# Altium PCB Power.PcbDoc
Units mil, origin at the board's own origin, x right, y up, seen from the top; angles counter-clockwise.
Board outline 3625 x 3400 mil, 2 copper layers (Component Side, Bottom Layer), stack 65.756 mil thick; 69 components, 42 nets, 303 pads, 74 vias.
Unrouted connection lines stored in the file: 1.
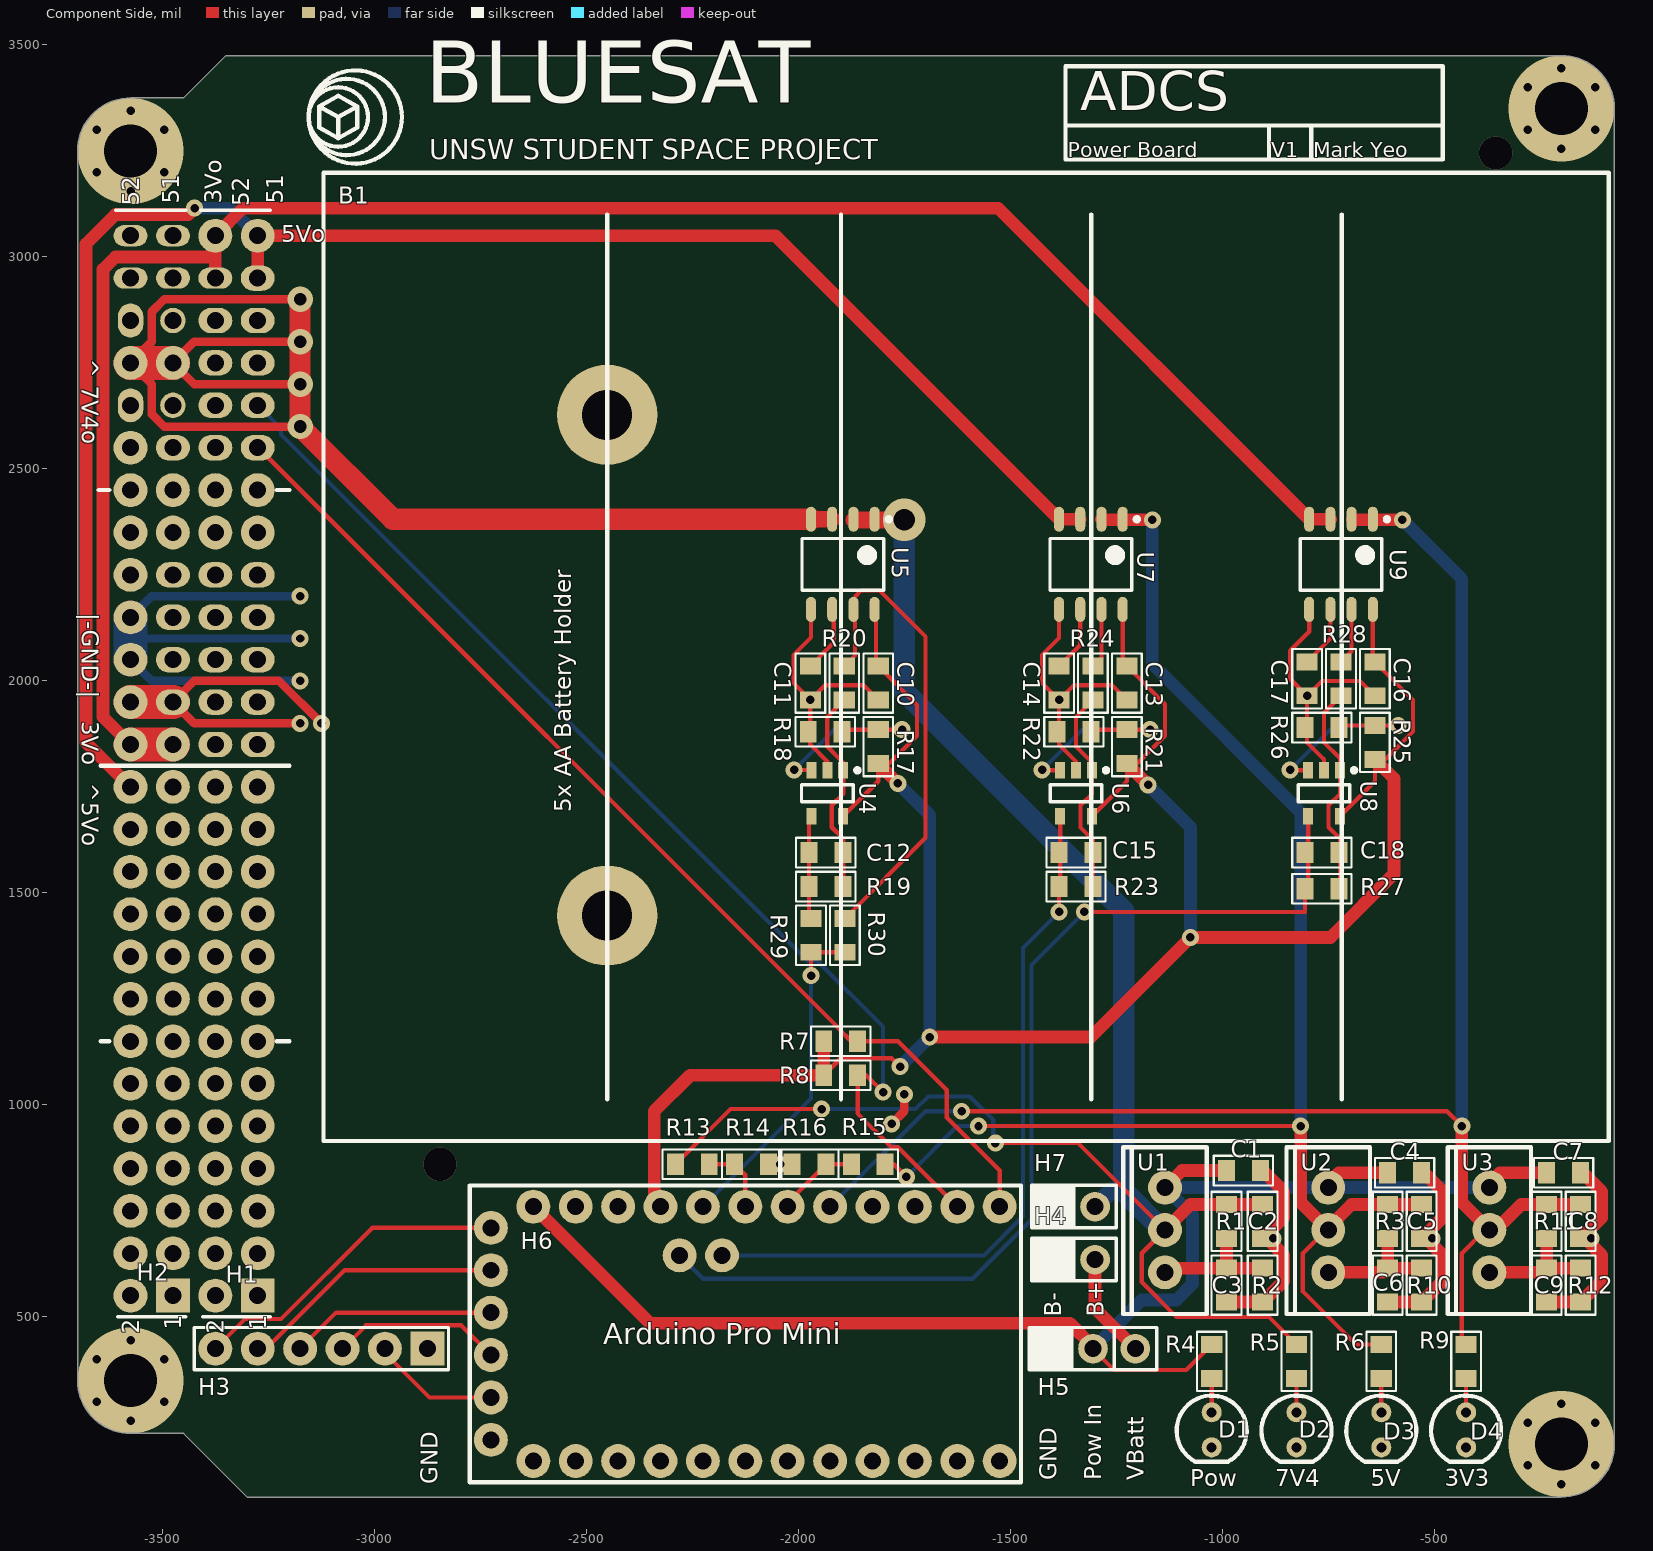
[diagram p0: Component Side view]
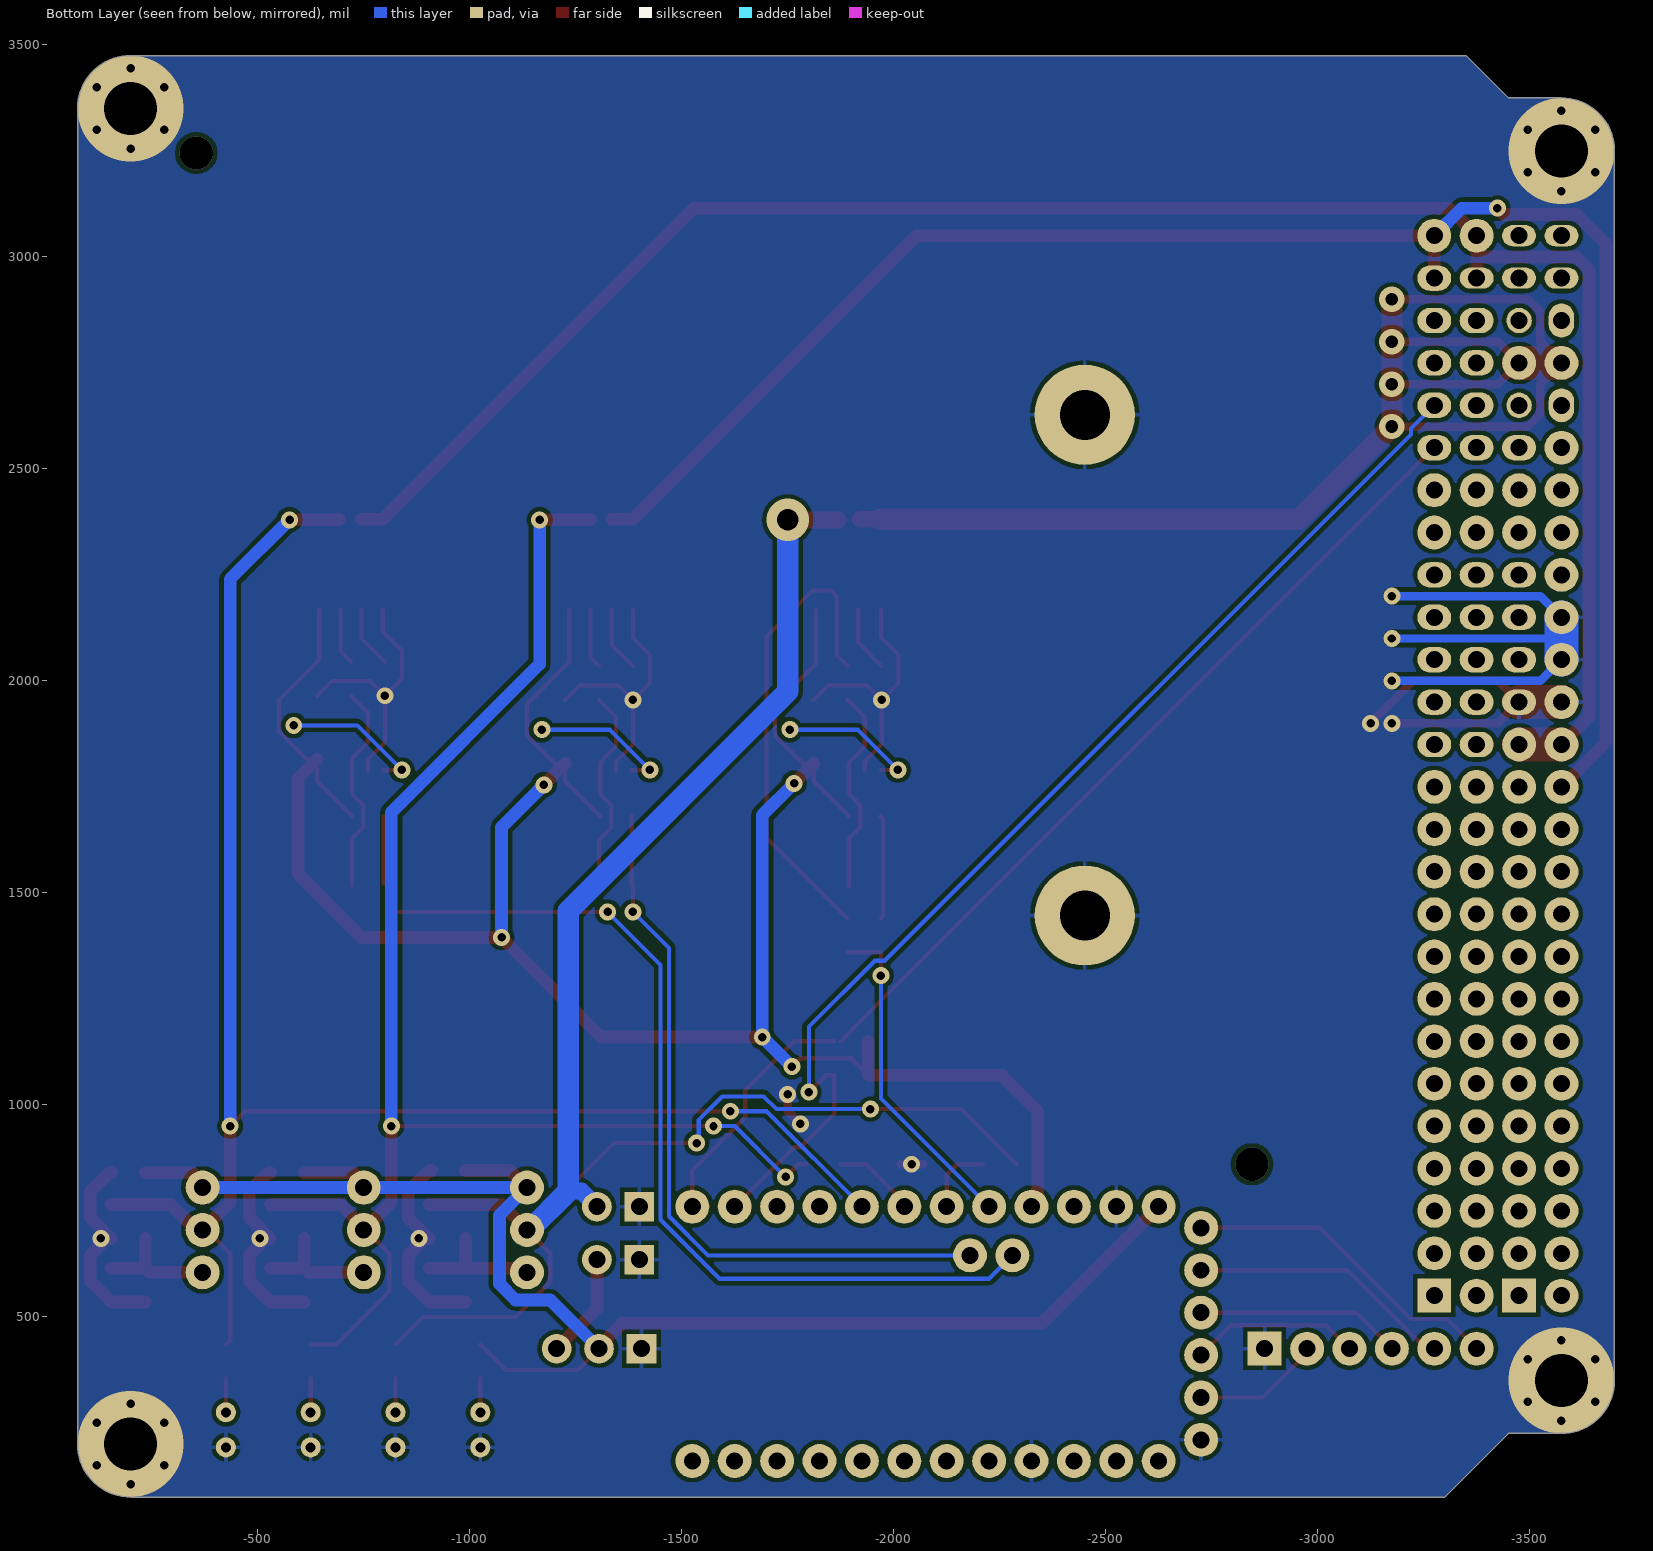
[diagram p1: Bottom Layer view, seen from below]

## Layer stack, top to bottom
Top Solder: solder mask 0.394, Solder Resist, Dk 3.5
Component Side: signal copper 1.378
Dielectric 1: core 63, FR-4, Dk 4.2
Bottom Layer: signal copper 1.378
Solder Side: solder mask 0.394, Solder Resist, Dk 3.5

## Board outline
-3575,225 cw(c-3575,350) -3700,350 -3700,3250 cw(c-3575,3250) -3575,3375 -3450,3375 -3350,3475 -200,3475 cw(c-200,3350) -75,3350 -75,200 cw(c-200,200) -200,75 -3300,75 -3450,225

## Design rules (kind name [scope] priority, off if disabled: settings)
Clearance [All] p1: gap=10
Clearance "Clearance (Same Net)" [All] p2: gap=0 except(8: SMDPad-SMDPad SMDPad-THPad SMDPad-Via)
ComponentClearance [All] p1: gap=0 collisioncheckmode=3 verticalgap=0 showdistances=FALSE
HoleSize HoleSize_1 [All] p1: absolutevalues=TRUE maxlimit=100000 minlimit=24 maxpercent=80.000 minpercent=20.000
HoleSize [All] p2: absolutevalues=TRUE maxlimit=100 minlimit=1 maxpercent=80.000 minpercent=20.000
HoleToHoleClearance mdViaViaSameLayer [All] p1: gap=8 allowstackedmicrovias=TRUE
HoleToHoleClearance [All] p2: gap=10 allowstackedmicrovias=TRUE
PasteMaskExpansion mlMinCreamFrame [All] p1: expansion=0
PasteMaskExpansion [All] p2: expansion=0
PlaneConnect PlaneConnect_1 [All] p1: planeconnectstyle=Relief reliefexpansion=20 reliefentries=4 reliefconductorwidth=10 reliefairgap=10
PlaneConnect PlaneConnect_2 [IsVia AND InNet('GND')] p2: planeconnectstyle=Direct reliefexpansion=20 reliefentries=4 reliefconductorwidth=10 reliefairgap=10
PolygonConnect ThermalVias [IsVia] p1: connectstyle=Direct reliefconductorwidth=10 reliefentries=4 polygonreliefangle="90 Angle" airgapwidth=10
PolygonConnect [All] p2: connectstyle=Relief reliefconductorwidth=10 reliefentries=4 polygonreliefangle="90 Angle" airgapwidth=10
RoutingVias [All] p1: holewidth=28 width=50 viastyle="Through Hole" minholewidth=28 minwidth=50 maxholewidth=28 maxwidth=50
SilkToSilkClearance [All] p1 off: silktosilkclearance=10
SilkToSolderMaskClearance [IsPad] p1 off: minsilkscreentomaskgap=10 clearancetoexposedcopper=TRUE
SolderMaskExpansion mlMinStopFrame [All] p1: expansion=4
SolderMaskExpansion [All] p2: expansion=4
Width Width_1 [All] p1: maxlimit=100000 minlimit=6 preferedwidth=10
Width [All] p2: maxlimit=10 minlimit=8 preferedwidth=10
23 further rules are at their usual default settings.

## Components (designator, comment, footprint, x,y, rotation, side; value= is the part's Value field where it differs from the comment)
B1 "5x AA Battery Holder" "5x AA Battery Holder" -3120,915 r0 top
C1 "100nF" 0805C-TBD -980,845 r0 top
C2 "1UF" 0805C-GENERIC -905,755 r270 top
C3 "10uF" 0805C-GENERIC -990,605 r270 top
C4 "100nF" 0805C-TBD -600,840 r0 top
C5 "1UF" 0805C-GENERIC -530,755 r270 top
C6 "10uF" 0805C-GENERIC -610,605 r270 top
C7 "100nF" 0805C-TBD -225,840 r0 top
C8 "1UF" 0805C-GENERIC -155,755 r270 top
C9 "10uF" 0805C-GENERIC -235,605 r270 top
C10 "100nF" 0805C-TBD -1811.57,2025 r270 top
C11 "10nF" 0805C-TBD -1971.57,2025 r270 top
C12 "1nF" 0805C-TBD -1965,1595 r0 top
C13 "100nF" 0805C-TBD -1225,2025 r270 top
C14 "10nF" 0805C-TBD -1385,2025 r270 top
C15 "1nF" 0805C-TBD -1375,1595 r0 top
C16 "100nF" 0805C-TBD -640,2035 r270 top
C17 "10nF" 0805C-TBD -800,2035 r270 top
C18 "1nF" 0805C-TBD -795,1595 r0 top
D1 "LED" LED -1025,275 r0 top
D2 "LED" LED -825,275 r0 top
D3 "LED" LED -625,275 r0 top
D4 "LED" LED -425,275 r0 top
H1 "26X2 Header" "26X2 Header"#1 -3275,550 r90 top
H2 "26X2 Header" "26X2 Header"#2 -3475,550 r90 top
H3 "Header 6" HDR1X6 -2875,425 r180 top
H4 "HEADER-1X2" HEADER-1X2 -1400,635 r90 top
H5 "HEADER-1X3" HEADER-1X3 -1405,425 r90 top
H6 "Arduino Pro Mini" "Arduino Pro Mini" -2625,160 r90 top
H7 "HEADER-1X2" HEADER-1X2 -1400,760 r90 top
R1 "1R" 0805R-GENERIC -990,695 r90 top
R2 "1R" 0805R-GENERIC -905,605 r270 top
R3 "1R" 0805R-GENERIC -610,695 r90 top
R4 "150R" 0805R-150 -1025,425 r270 top
R5 "150R" 0805R-150 -825,425 r270 top
R6 "150R" 0805R-150 -625,425 r270 top
R7 "4K7" 0805R-4K7 -1930,1150 r0 top
R8 "4K7" 0805R-4K7 -1930,1070 r0 top
R9 "150R" 0805R-150 -425,425 r270 top
R10 "1R" 0805R-GENERIC -530,605 r270 top
R11 "1R" 0805R-GENERIC -235,695 r90 top
R12 "1R" 0805R-GENERIC -155,605 r270 top
R13 "28K5" 0805R-10K -2290,860 r0 top
R14 "10K" 0805R-10K -2150,860 r0 top
R15 "10K" 0805R-10K -1795,860 r180 top
R16 "40K" 0805R-10K -1935,860 r180 top
R17 "100K" 0805R-100K -1811.57,1815 r90 top
R18 "100K" 0805R-100K -1906.57,1880 r180 top
R19 "3K3" 0805R-3K3 -1965,1515 r0 top
R20 "1K" 0805R-1K -1891.57,2025 r270 top
R21 "100K" 0805R-100K -1225,1815 r90 top
R22 "100K" 0805R-100K -1320,1880 r180 top
R23 "3K3" 0805R-3K3 -1375,1515 r0 top
R24 "1K" 0805R-1K -1305,2025 r270 top
R25 "100K" 0805R-100K -640,1825 r90 top
R26 "100K" 0805R-100K -735,1890 r180 top
R27 "3K3" 0805R-3K3 -795,1510 r0 top
R28 "1K" 0805R-1K -720,2035 r270 top
R29 "0R" 0805R-GENERIC -1970,1430 r270 top
R30 "0R" 0805R-GENERIC -1890,1430 r270 top
U1 "LM317T" LM317T -1135,605 r90 top
U2 "LM317T" LM317T -750,605 r90 top
U3 "LM317T" LM317T -370,605 r90 top
U4 "LM321" LM321 -1931.57,1735 r270 top
U5 "ACS712" ACS712 -1895,2275 r270 top
U6 "LM321" LM321 -1345,1735 r270 top
U7 "ACS712" ACS712 -1310,2275 r270 top
U8 "LM321" LM321 -760,1735 r270 top
U9 "ACS712" ACS712 -720,2275 r270 top

## Footprints (in the part's own frame and the unit in brackets; to place one, negate y for a bottom-side part, rotate by r counter-clockwise, add the part's x,y. Pads: shape width x height; smd on the part's side, far side on the other; paste and mask are expansions set on the pad)
"5x AA Battery Holder" [mm]
  round 6 hole 3 mask+0.102: 1(17,43.5)
  round 6 hole 3: 2(17,13.5)
  silkscreen extent 0,0 77,58
"26X2 Header"#1 [mil]
  rect 80x80 hole 40: 1(0,0)
  round 80 hole 40: 2(0,100) 3(100,0) 4(100,100) 5(200,0) 6(200,100) 7(300,0) 8(300,100) 9(400,0) 10(400,100) 11(500,0) 12(500,100) 13(600,0) 14(600,100) 15(700,0) 16(700,100) 17(800,0) 18(800,100) 19(900,0) 20(900,100) 21(1000,0) 22(1000,100) 23(1100,0) 24(1100,100) 25(1200,0) 26(1200,100) 37(1800,0) 38(1800,100) 39(1900,0) 40(1900,100) 51(2500,0) 52(2500,100)
  oval 60x80 hole 40: 27(1300,0) 28(1300,100) 29(1400,0) 30(1400,100) 31(1500,0) 32(1500,100) 33(1600,0) 34(1600,100) 35(1700,0) 36(1700,100) 41(2000,0) 42(2000,100) 43(2100,0) 44(2100,100) 45(2200,0) 46(2200,100) 47(2300,0) 48(2300,100) 49(2400,0)
  oval 50x80 hole 40: 50(2400,100)
  silkscreen extent -50,-30 2560,135, body extent -55,-47 2555,150, height 335
"26X2 Header"#2 [mil]
  rect 80x80 hole 40: 1(0,0)
  round 80 hole 40: 2(0,100) 3(100,0) 4(100,100) 5(200,0) 6(200,100) 7(300,0) 8(300,100) 9(400,0) 10(400,100) 11(500,0) 12(500,100) 13(600,0) 14(600,100) 15(700,0) 16(700,100) 17(800,0) 18(800,100) 19(900,0) 20(900,100) 21(1000,0) 22(1000,100) 23(1100,0) 24(1100,100) 25(1200,0) 26(1200,100) 27(1300,0) 28(1300,100) 30(1400,100) 32(1500,100) 34(1600,100) 36(1700,100) 37(1800,0) 38(1800,100) 39(1900,0) 40(1900,100) 42(2000,100) 45(2200,0) 46(2200,100)
  oval 60x80 hole 40: 29(1400,0) 31(1500,0) 33(1600,0) 35(1700,0) 41(2000,0)
  round 60 hole 40: 43(2100,0) 47(2300,0)
  oval 80x60 hole 40: 44(2100,100) 48(2300,100)
  oval 50x80 hole 40: 49(2400,0) 50(2400,100) 51(2500,0) 52(2500,100)
  silkscreen extent -50,-30 2560,135, body extent -55,-47 2555,150, height 335
0805C-GENERIC [mil] "CAPACITOR 0805"
  rect 40x50 smd: 1(-10,0) 2(70,0)
  silkscreen extent -40,-35 100,35, body extent -11,-25 70,25, height 26
0805C-TBD [mil] "CAPACITOR 0805"
  rect 40x50 smd: 1(-10,0) 2(70,0)
  silkscreen extent -40,-35 100,35, body extent -11,-25 70,25, height 26
0805R-1K [mil] "RESISTOR 0805"
  rect 40x50 smd: 1(-10,0) 2(70,0)
  silkscreen extent -40,-35 100,35, body extent -11,-25 70,25, height 27
0805R-3K3 [mil] "RESISTOR 0805"
  rect 40x50 smd: 1(-10,0) 2(70,0)
  silkscreen extent -40,-35 100,35, body extent -11,-25 70,25, height 27
0805R-4K7 [mil] "RESISTOR 0805"
  rect 40x50 smd: 1(-10,0) 2(70,0)
  silkscreen extent -40,-35 100,35, body extent -11,-25 70,25, height 27
0805R-10K [mil] "RESISTOR 0805"
  rect 40x50 smd: 1(0,0) 2(80,0)
  silkscreen extent -30,-35 110,35, body extent -1,-25 80,25, height 27
0805R-100K [mil] "RESISTOR 0805"
  rect 40x50 smd: 1(-10,0) 2(70,0)
  silkscreen extent -40,-35 100,35, body extent -11,-25 70,25, height 27
0805R-150 [mil] "RESISTOR 0805"
  rect 40x50 smd: 1(-10,0) 2(70,0)
  silkscreen extent -40,-35 100,35, body extent -11,-25 70,25, height 27
0805R-GENERIC [mil] "RESISTOR 0805"
  rect 40x50 smd: 1(-10,0) 2(70,0)
  silkscreen extent -40,-35 100,35, body extent -11,-25 70,25, height 27
ACS712 [mm]
  oval 1.5x0.6 smd: 1(-2.7,1.905) 2(-2.7,0.635) 3(-2.7,-0.635) 4(-2.7,-1.905) 5(2.7,-1.905) 6(2.7,-0.635) 7(2.7,0.635) 8(2.7,1.905)
  silkscreen extent -2.82,-2.45 1.55,2.88, body extent -3,-2.45 3,2.45, height 1.9
"Arduino Pro Mini" [mil]
  round 80 hole 40: 1(0,0) 2(0,-100) 3(0,-200) 4(0,-300) 5(0,-400) 6(0,-500) 7(0,-600) 8(0,-700) 9(0,-800) 10(0,-900) 11(0,-1000) 12(0,-1100) 13(600,0) 14(600,-100) 15(600,-200) 16(600,-300) 17(600,-400) 18(600,-500) 19(600,-600) 20(600,-700) 21(600,-800) 22(600,-900) 23(600,-1000) 24(600,-1100) 25(485,-345) 26(485,-445) 27(50,100) 28(150,100) 29(250,100) 30(350,100) 31(450,100) 32(550,100)
  silkscreen extent -50,-1150 650,150
HDR1X6 [mil] "Connector; Header; 6 Position"
  rect 80x80 hole 40: 1(0,0)
  round 80 hole 40: 2(100,0) 3(200,0) 4(300,0) 5(400,0) 6(500,0)
  silkscreen extent -50,-50 550,50
HEADER-1X2 [mil]
  rect 70x70 hole 40: 1(0,0)
  round 70 hole 40: 2(0,-100)
  silkscreen extent -50,-150 50,50, body extent -50,-150 50,50, height 470
HEADER-1X3 [mil]
  rect 70x70 hole 40: 1(0,0)
  round 70 hole 40: 2(0,-100) 3(0,-200)
  silkscreen extent -50,-250 50,50, body extent -50,-250 50,50, height 470
LED [mm]
  round 1.2 hole 0.6: 1(0,0) 2(0,-2.1)
  silkscreen extent -2.1,-2.96 2.1,1
LM317T [mil]
  round 80 hole 40: 1(0,0) 2(100,0) 3(200,0)
  silkscreen extent -98,-98 295,98
LM321 [mm]
  rect 1x0.6 smd: 1(-1.375,0.95) 2(-1.375,0) 3(-1.375,-0.95) 4(1.375,-0.95) 5(1.375,0.95)
  silkscreen extent -1.5,-1.55 0.5,1.93, body extent -1.5,-1.53 1.5,1.53, height 1.45

## Part data
C1 C4 C7 C10 C11 C12 C13 C14 C15 C16 C17 C18: library part 0805C-100nF-25V-X7R-MUR, "CAPACITOR 0805 CERAMIC"
C2 C5 C8: library part 0805C-2U2-6V3-X5R-PAN, "CAPACITOR 0805 CERAMIC"
C3 C6 C9: library part 0805C-10UF-25V-X5R-SAM, "CAPACITOR 0805 CERAMIC"
D1 D2 D3 D4: "Small LED"
H3: "Header, 6-Pin"
R1 R2 R3 R10 R11 R12: library part 0805R-1R, "RESISTOR 0805 1/3 WATT"
R4 R5 R6 R9: library part 0805R-150, "RESISTOR 0805 1/4 WATT THIN FILM"
R7 R8: library part 0805R-4K7, "RESISTOR 0805 1/4 WATT THIN FILM"
R13 R14 R15 R16: library part 0805R-10K, "RESISTOR 0805 1/4 WATT THIN FILM"
R17 R18 R21 R22 R25 R26: library part 0805R-100K, "RESISTOR 0805 1/4 WATT THIN FILM"
R19 R23 R27: library part 0805R-3K3, "RESISTOR 0805 1/4 WATT THIN FILM"
R20 R24 R28: library part 0805R-1K, "RESISTOR 0805 1/4 WATT THIN FILM"
R29 R30: library part 0805R-0R, "RESISTOR 0805 1 WATT"
U1 U2 U3: "Adjustable Voltage Regulator"
U4 U6 U8: "Op-amp"
U5 U7 U9: "Current Sensor"

## Via types
v1: diameter 40, hole 20, Component Side to Bottom Layer, 63 vias
v2: diameter 60, hole 30, Component Side to Bottom Layer, 4 vias
v3: diameter 250, hole 125, Component Side to Bottom Layer, 4 vias
v4: diameter 78.74, hole 78.74, Component Side to Bottom Layer, 2 vias
v5: diameter 100, hole 50, Component Side to Bottom Layer, 1 vias

## Nets (pads, with @x,y where several pads share a name; then routed paths per layer and width w, separated by ;. In a path a pad name is that pad's centre, name@x,y a point inside that pad or via, vN(x,y) a via of type N, cw(c..) or ccw(c..) an arc to the next point about the centre after c; other vN are vias at no path point)
3V3: C8.1 H6.20 R9.1 R11.2 U3.2 U9.1 U9.2 | length 4023.1
  Component Side w10: v1(-1615,985) -470,985 v1(-435,950) ; R9.1 -435,445 -435,650 U3.2@-380,705
  Component Side w30: U9.2@-693.7,2380 v1(-575,2380) ; v1(-435,950) -435,770 U3.2 ; U3.2@-380,705 U3.2 ; C8.1 R11.2 -295,765 -355,705 U3.2
  Bottom Layer w10: H6.20 -1700,985 v1(-1615,985)
  Bottom Layer w30: v1(-575,2380) -435,2240 v1(-435,950)
3V3_OUT: H1.50 H1.52 H2.27 H2.28 U9.3 U9.4 | length 4585.6
  Component Side w30: H2.28 -3640,1915 -3640,2970.71 -3610.71,3000 -3375,3000 ; H1.50 -3375,3000 ; U9.3 U9.4 -1528.7,3115 -3310,3115 H1.52 -3375,3000
  Component Side w80: H2.28 H2.27
5V: C5.1 R3.2 R6.1 R15.1 U2.2 U7.1 U7.2 | length 3664
  Component Side w10: R15.1 -1775,860 v1(-1745,830) ; v1(-1575,950) v1(-815,950) ; U2.2@-755,705 -810,650 -810,560 -685,435 R6.1
  Component Side w30: U7.2 -1283.7,2380 v1(-1165,2380) ; v1(-815,950) -815,770 U2.2@-752.5,707.5 ; U2.2@-755,705 U2.2@-752.5,707.5 ; U2.2 U2.2@-752.5,707.5 ; C5.1 R3.2 -695,765 U2.2@-752.5,707.5
  Bottom Layer w10: v1(-1745,830) -1625,950 v1(-1575,950)
  Bottom Layer w30: v1(-1165,2380) -1165,2040 -815,1690 v1(-815,950)
5V_OUT: H1.49 H1.51 H2.25 H2.26 U7.3 U7.4 | length 4108
  Component Side w30: H2.26 -3680,1855 -3680,3030.71 -3610.71,3100 -3439,3100 v1(-3424,3115) ; H1.49 H1.51 -2053.7,3050 U7.4 U7.3
  Bottom Layer w30: v1(-3424,3115) -3340,3115 H1.51
7.5V_IN: C1.1 C4.1 C7.1 H5.2 H6.13 R4.1 U1.3 U2.3 U3.3 | length 3578.2
  Component Side w10: H5.2 -1255,375 -1085,375 R4.1
  Component Side w30: H6.13 -2350,485 -1359.64,485 -1305,430.36 H5.2 ; U1.3 -1095,845 C1.1 ; U2.3@-755,805 -755,810 -725,840 C4.1 ; U3.3@-380,805 -345,840 C7.1
  Bottom Layer w30: H5.2 -1190,540 -1108.08,540 -1070,578.08 -1070,740 U1.3 U3.3@-380,805
7V4: C2.1 H7.2 R1.2 R5.1 R13.1 U1.2 U5.1 U5.2 | length 4341.7
  Component Side w10: R13.1 -2160,990 v1(-1945,990) ; v1(-1535,910) -1340,910 U1.2 -1190,650 -1190,582.22 -1107.78,500 -890,500 R5.1
  Component Side w30: U1.2 -1075,765 R1.2 C2.1
  Component Side w40: U5.2@-1868.7,2380 v5(-1750,2380)
  Bottom Layer w10: v1(-1945,990) -1723.28,990 -1693.28,1020 -1595.5,1020 -1540,964.5 -1540,915 v1(-1535,910)
  Bottom Layer w40: H7.2 -1263.57,796.43 -1232.5,796.43
  Bottom Layer w50: v5(-1750,2380) -1750,1975 -1232.5,1457.5 -1232.5,796.43 -1141.07,705 U1.2
7V4_OUT: H2.45 H2.46 U5.3 U5.4 | length 3394.1
  Component Side w20: v2(-3175,2600) -3495.71,2600 -3525,2629.29 -3525,2700 H2.46 -3525,2800 -3525,2870.71 -3495.71,2900 v2(-3175,2900) ; v2(-3175,2700) -3425,2700 H2.45 -3425,2800 v2(-3175,2800)
  Component Side w40: U5.4 U5.3
  Component Side w50: v2(-3175,2900) v2(-3175,2600) -2956.3,2381.3 U5.4
  Component Side w80: H2.46 H2.45
CURR_3V3: C18.1 H6.25 R27.1 U8.4 | length 2426.4
  Component Side w10: v1(-1325,1455) -805,1455 R27.1@-805,1515 ; R27.1@-797.4,1522.6 U8.4
  Bottom Layer w10: H6.25 -2225,590 -1588.93,590 -1450,728.93 -1450,1330 v1(-1325,1455)
CURR_5V: C15.1 H6.26 R23.1 U6.4 | length 1730.7
  Component Side w10: v1(-1385,1455) R23.1 ; R23.1@-1382.4,1517.6 U6.4
  Bottom Layer w10: H6.26@-2180,660 -2165,645 -1562.22,645 -1470,737.22 -1470,1370 v1(-1385,1455)
CURR_7V4: H6.17 R29.2 R30.2 | length 785.6
  Component Side w10: v1(-1970,1305) R29.2 R30.2
  Bottom Layer w10: H6.17 -1970,1015 v1(-1970,1305)
GND: B1.1 B1.2 C1.2 C2.2 C3.2 C4.2 C5.2 C6.2 C7.2 C8.2 C9.2 C10.2 C11.2 C13.2 C14.2 C16.2 C17.2 D1.2 D2.2 D3.2 D4.2 H2.29 H2.30 H2.32 H2.34 H3.1 H4.1 H5.1 H6.4 H6.14 H6.27 H7.1 R2.2 R10.2 R12.2 R14.2 R16.2 R18.2 R22.2 R26.2 U4.2 U5.5 U6.2 U7.5 U8.2 U9.5 | length 5611.2
  Component Side w10: U5.5 -1970,2102.79 -2011.57,2061.21 -2011.57,1995 v1(-1971.57,1955) ; U4.2 -1931.57,1810 -1971.57,1850 v1(-1971.57,1955) ; C10.2 -1846.57,1990 -1936.57,1990 v1(-1971.57,1955) ; U7.5 -1385,2101.21 -1425,2061.21 -1425,1995 v1(-1385,1955) ; U6.2 -1345,1810 -1385,1850 v1(-1385,1955) ; C13.2 -1260,1990 -1350,1990 v1(-1385,1955) ; U9.5 -795,2116.21 -840,2071.21 -840,2005 v1(-800,1965) ; U8.2 -760,1815 -800,1855 v1(-800,1965) ; C16.2 -675,2000 -765,2000 v1(-800,1965)
  Component Side w20: v1(-3175,1900) -3425,1900 H2.29 -3425,2000 -3225,2000 v1(-3125,1900) ; R14.2 R16.2 ; v1(-1780,955) -1750,985 v1(-1750,1025)
  Component Side w30: C3.2 R2.2 ; C1.2 -904.64,845 -855,795.36 -855,734.64 -904.64,685 -894.64,685 -855,645.36 -855,584.64 R2.2@-904.64,535 ; C6.2 R10.2 -529.64,535 -480,584.64 -480,645.36 -519.64,685 -529.64,685 -480,734.64 -480,795.36 -524.64,840 C4.2 ; C9.2 R12.2 -154.64,535 -105,584.64 -105,645.36 -144.64,685 -154.64,685 -105,734.64 -105,795.36 -149.64,840 C7.2
  Component Side w80: H2.30 H2.29
  Bottom Layer w20: H2.32 -3525,2000 v1(-3175,2000) ; -3575,2100 v1(-3175,2100) ; H2.34 -3525,2200 v1(-3175,2200)
  Bottom Layer w80: H2.32 -3575,2100 H2.34
  other v1: -200,105 -280,150 -120,150 -280,250 -120,250 -3575,255 -200,295 -3655,300 -3495,300 -3655,400 -3495,400 -3575,445 -880,685 -505,685 -130,685 -2042.5,860 -3575,3155 -3655,3200 -3495,3200 -200,3255 -3655,3300 -3495,3300 -280,3300 -120,3300 -3575,3345 -280,3400 -120,3400 -200,3445
  other v3: -200,200 -3575,350 -3575,3250 -200,3350
NetC3_1: C3.1 R1.1 R2.1 U1.1 | length 304.1
  Component Side w30: U1.1 -1125,615 C3.1 ; R1.1 C3.1 ; R2.1 C3.1
NetC6_1: C6.1 R3.1 R10.1 U2.1 | length 299.1
  Component Side w30: U2.1@-755,605 -620,605 C6.1 ; R3.1 C6.1 ; R10.1 C6.1
NetC9_1: C9.1 R11.1 R12.1 U3.1 | length 299.1
  Component Side w30: U3.1@-380,605 -245,605 C9.1 ; R11.1 C9.1 ; R12.1 C9.1
NetC11_1: C11.1 U5.6 | length 156.5
  Component Side w10: C11.1 -1916.57,2090 U5.6@-1916.57,2168.7
NetC12_1: C12.1 R19.1 R29.1 U4.4 | length 245.4
  Component Side w10: R29.1 -1975,1445 R19.1 C12.1 -1975,1674.84 U4.4
NetC12_2: C12.2 R19.2 R20.2 U4.1 | length 493.4
  Component Side w10: R19.2@-1894.17,1515.83 -1894.17,1628.16 -1920.98,1654.97 -1920.98,1706.76 -1894.17,1733.58 U4.1 -1894.17,1807.6 -1931.57,1845 -1931.57,1915 R20.2
NetC14_1: C14.1 U7.6 | length 154.4
  Component Side w10: C14.1 -1335,2085 U7.6
NetC15_2: C15.2 R23.2 R24.2 U6.1 | length 495.3
  Component Side w10: R23.2 C15.2 -1305,1625 -1334.41,1654.41 -1334.41,1706.76 -1307.6,1733.58 U6.1 -1307.6,1807.6 -1345,1845 -1345,1915 R24.2
NetC17_1: C17.1 U9.6 | length 146.5
  Component Side w10: C17.1 -745,2100 U9.6
NetC18_2: C18.2 R27.2 R28.2 U8.1 | length 501.9
  Component Side w10: R27.2@-722.6,1517.4 -722.6,1628.16 -749.41,1654.97 -749.41,1706.76 -722.6,1733.58 U8.1 -722.6,1817.6 -760,1855 -760,1925 R28.2
NetD1_1: D1.1 R4.2 | length 80
  Component Side w10: D1.1 R4.2
NetD2_1: D2.1 R5.2 | length 80
  Component Side w10: D2.1 R5.2
NetD3_1: D3.1 R6.2 | length 80
  Component Side w10: D3.1 R6.2
NetD4_1: D4.1 R9.2 | length 80
  Component Side w10: D4.1 R9.2
NetH3_2: H3.2 H6.28 | length 303.5
  Component Side w10: H3.2 -2975,415 -2870,310 H6.28
NetH3_3: H3.3 H6.29 | length 401.8
  Component Side w10: H3.3 -3020,480 -2795,480 H6.29
NetH3_4: H3.4 H6.30 | length 485.2
  Component Side w10: H3.4 -3090,510 H6.30
NetH3_5: H3.5 H6.31 | length 631.1
  Component Side w10: H3.5@-3270.5,425 H3.5 -3255,425 -3070,610 H6.31
NetH3_6: H3.6 H6.32 | length 768.1
  Component Side w10: H3.6 -3305,495 -3220,495 -3005,710 H6.32
NetH4_2: H4.2 H5.3 | length 249.4
  Component Side w30: H4.2 -1300,520 H5.3
NetH6_18: H6.18 R13.2 R14.1 | length 170.4
  Component Side w10: R13.2 R14.1 -2125,835 H6.18
NetH6_19: H6.19 R15.2 R16.1 | length 197.3
  Component Side w10: H6.19 -2025,770 R16.1 R15.2
NetR17_2: R17.2 R18.1 U4.3 | length 471.1
  Component Side w10: v1(-2010,1790) U4.3@-1969.84,1790 ; R18.1@-1891.57,1885 R17.2 v1(-1755,1885)
  Bottom Layer w10: v1(-2010,1790) -1915,1885 v1(-1755,1885)
NetR20_1: R20.1 R30.1 U5.7 | length 1134.6
  Component Side w10: R20.1 -1866.57,2060 -1866.57,2198.43 -1851.77,2213.23 -1808.89,2213.23 -1700,2104.33 -1700,1630 R30.1
NetR21_2: R21.2 R22.1 U6.3 | length 471.1
  Component Side w10: v1@-1424.13,1789.13 U6.3 ; R22.1@-1305,1885 R21.2 v1(-1170,1885)
  Bottom Layer w10: v1(-1425,1790) -1330,1885 v1(-1170,1885)
NetR24_1: R24.1 U7.7 | length 142
  Component Side w10: R24.1 -1285,2055 U7.7
NetR25_2: R25.2 R26.1 U8.3 | length 475.2
  Component Side w10: v1@-839.13,1789.13 U8.3 ; R26.1@-720,1895 R25.2 v1(-585,1895)
  Bottom Layer w10: v1(-840,1790) -735,1895 v1(-585,1895)
NetR28_1: R28.1 U9.7 | length 134.1
  Component Side w10: R28.1 -695,2070 U9.7
SCL_EXT: H1.43 H6.23 R8.2 | length 2752.2
  Component Side w10: v1(-1800,1030) -1840,1070 R8.2 -1860,980 -1780,900 -1765,900 H6.23 H6.23@-1640,760
  Bottom Layer w10: H1.43 -3220,2595 -3220,2581.36 -1978.64,1340 -1955.5,1340 -1800,1184.5 v1(-1800,1030)
SDA_EXT: H1.41 H6.24 R7.2 | length 2565
  Component Side w10: H1.41 -3273.79,2550 -1905,1181.21 -1905,1180 R7.2@-1875,1150 ; R7.2 -1765,1150 -1650,1035 -1650,970.5 -1525,845.5 H6.24
VCC: C10.1 C13.1 C16.1 H6.16 R7.1 R8.1 R17.1 R21.1 R25.1 U4.5 U5.8 U6.5 U7.8 U8.5 U9.8 | length 5604.3
  Component Side w10: R8.1 -1900,1110 -1780,1110 v1(-1760,1090) ; U4.5 -1811.57,1763.46 R17.1 -1785.5,1805 -1720,1870.5 -1720,1943.43 C10.1 -1816.57,2040 U5.8@-1816.57,2168.7 ; U6.5 -1225,1763.46 R21.1 -1200.5,1805 -1135,1870.5 -1135,1945 C13.1 -1235,2045 U7.8 ; U8.5 -640,1763.46 R25.1 -615.5,1815 -550,1880.5 -550,1955 C16.1 -645,2050 U9.8
  Component Side w30: H6.16 -2340,775 -2340,985 -2255,1070 R8.1 R7.1 ; R17.1 v1(-1765,1758.43) ; v1(-1690,1160) -1310,1160 v1(-1075,1395) -745,1395 -595,1545 -595,1770 R25.1 ; R21.1 v1(-1175,1755)
  Bottom Layer w30: v1(-1765,1758.43) -1690,1683.43 v1(-1690,1160) v1(-1760,1090) ; v1(-1175,1755) -1075,1655 v1(-1075,1395)
pads on no net: H1.1 H1.2 H1.3 H1.4 H1.5 H1.6 H1.7 H1.8 H1.9 H1.10 H1.11 H1.12 H1.13 H1.14 H1.15 H1.16 H1.17 H1.18 H1.19 H1.20 H1.21 H1.22 H1.23 H1.24 H1.25 H1.26 H1.27 H1.28 H1.29 H1.30 H1.31 H1.32 H1.33 H1.34 H1.35 H1.36 H1.37 H1.38 H1.39 H1.40 H1.42 H1.44 H1.45 H1.46 H1.47 H1.48 H2.1 H2.2 H2.3 H2.4 H2.5 H2.6 H2.7 H2.8 H2.9 H2.10 H2.11 H2.12 H2.13 H2.14 H2.15 H2.16 H2.17 H2.18 H2.19 H2.20 H2.21 H2.22 H2.23 H2.24 H2.31 H2.33 H2.35 H2.36 H2.37 H2.38 H2.39 H2.40 H2.41 H2.42 H2.43 H2.44 H2.47 H2.48 H2.49 H2.50 H2.51 H2.52 H6.1 H6.2 H6.3 H6.5 H6.6 H6.7 H6.8 H6.9 H6.10 H6.11 H6.12 H6.15 H6.21 H6.22
copper on no net:
  other v4: -2845,860 -355,3245

## Polygon pours and split planes (outlines as drawn)
GND on Bottom Layer "Bottom Layer-GND" (solid, pour order 7): -3575,225 cw(c-3575,350) -3700,350 -3700,3250 cw(c-3575,3250) -3575,3375 -3450,3375 -3350,3475 -200,3475 cw(c-200,3350) -75,3350 -75,200 cw(c-200,200) -200,75 -3300,75 -3450,225

## Silkscreen, mask and mechanical layers (free items; w line width, h text height)
Top Overlay:
  circle w10: c-3045,3330 r110
  circle w10: c-3065,3330 r90
  circle w10: c-3085,3330 r70
  lines w10: -3650,2450 -3625,2450 ; -3645,1150 -3625,1150 ; -3645,1800 -3200,1800 ; -3230,1150 -3200,1150 ; -3230,2450 -3200,2450 ; -1370,3310 -480,3310 ; -890,3230 -890,3310 ; -790,3230 -790,3310 ; -3130,3355 -3085,3380 -3040,3355 ; -3130,3355 -3130,3305 -3085,3280 ; -3130,3355 -3085,3330 ; -3085,3280 -3040,3305 -3040,3355 ; -3085,3280 -3085,3330 ; -3085,3330 -3040,3355 ; -1370,3230 -480,3230 -480,3450 -1370,3450 -1370,3230
  text "BLUESAT" at -2880,3315 h250
  text "ADCS" at -1335,3315 h157.48
  text "Power Board" at -1365,3235 h35
  text "V1" at -885,3235 h35
  text "Mark Yeo" at -785,3235 h35
  text "UNSW STUDENT SPACE PROJECT" at -2870,3230 h47.24
  text "3Vo" at -3360,3125 h40 r90
  text "5Vo" at -3220,3035 h40
  text "^ 7V4o" at -3690,2760 h40 r270
  text "|-GND-|" at -3690,2160 h40 r270
  text "3Vo" at -3690,1905 h40 r270
  text "^5Vo" at -3690,1760 h40 r270
  text "B-" at -1380,500 h40 r90
  text "B+" at -1280,500 h40 r90
  text "GND" at -1390,115 h40 r90
  text "Pow In" at -1285,115 h40 r90
  text "VBatt" at -1185,115 h40 r90
  text "GND" at -2850,105 h40 r90
  text "Pow" at -1075,100 h40
  text "7V4" at -875,100 h40
  text "5V" at -650,100 h40
  text "3V3" at -475,100 h40
Mechanical 13:
  lines w10: -3700,350 ccw(c-3575,350) -3575,225 -3500,225 -3450,225 -3300,75 -200,75 ccw(c-200,200) -75,200 -75,3350 ccw(c-200,3350) -200,3475 -3350,3475 -3450,3375 -3500,3375 -3575,3375 ccw(c-3575,3250) -3700,3250 -3700,350

## Text inside footprints (layer, text, board x,y; h text height)
H1: Top Overlay "52" at -3295,3120 h40 r90; Top Overlay "51" at -3215,3125 h40 r90; Top Overlay "1" at -3255,470.16 h40 r90; Top Overlay "2" at -3355,460.16 h40 r90
H2: Top Overlay "52" at -3555,3120.16 h40 r90; Top Overlay "51" at -3460,3125.16 h40 r90; Top Overlay "1" at -3455,470.16 h40 r90; Top Overlay "2" at -3555,460.16 h40 r90